# Altium PCB STM32_Breakout.PcbDoc (part 2 of 2)
Units mm, origin at the board's own origin, x right, y up, seen from the top; angles counter-clockwise.
Board outline 95 x 95 mm, 4 copper layers (F.Cu, In1.Cu, In2.Cu, B.Cu); 115 components, 175 nets, 535 pads, 365 vias.
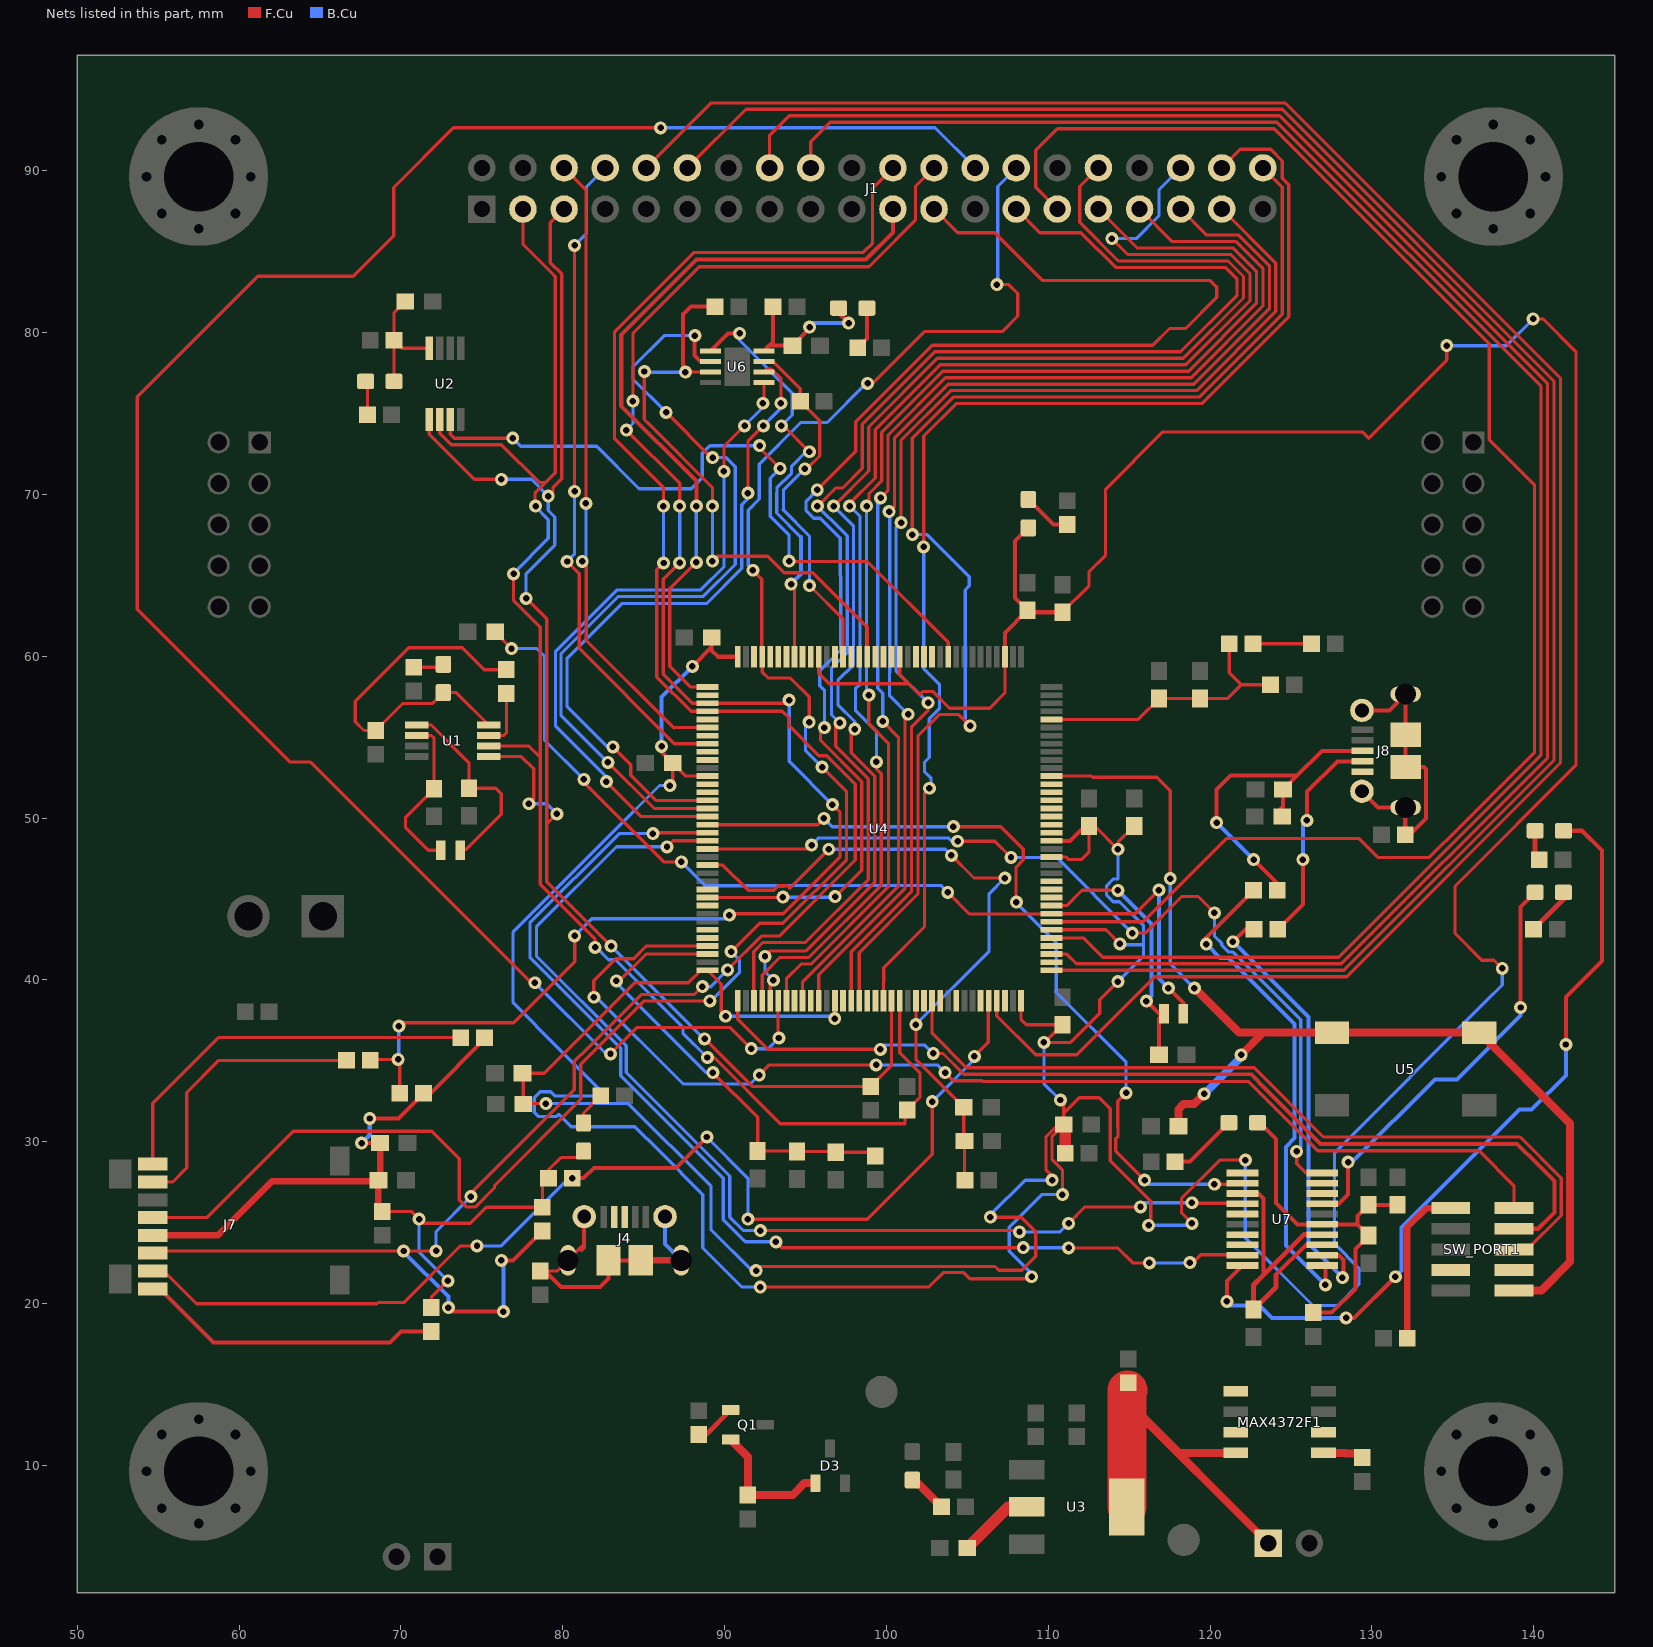
[diagram p2: the nets of this part, all layers, seen from the top]

## Via types
v1: diameter 0.8, hole 0.4, F.Cu to B.Cu, tented both sides, 363 vias
v2: diameter 1.2, hole 0.6, F.Cu to B.Cu, tented both sides, 2 vias

## Nets (pads, with @x,y where several pads share a name; then routed paths per layer and width w, separated by ;. In a path a pad name is that pad's centre, name@x,y a point inside that pad or via, vN(x,y) a via of type N, cw(c..) or ccw(c..) an arc to the next point about the centre after c; other vN are vias at no path point) (continued)
GPIO7: J1.21 U4.73 | length 46.9
  F.Cu w0.2: v1(88.25,65.8) 86.61,64.16 86.61,59.39 87.91,58.09 U4.73@88.943,58.09 ; v1@88.25,69.24 88.26,69.23 88.26,69.262 v1(88.25,69.272)
  F.Cu w0.25: v1(88.25,69.272) 88.25,70.81 83.612,75.448 83.612,79.837 88.275,84.5 98.72,84.5 100.4,86.18 J1.21@100.4,87.63
  B.Cu w0.2: v1(88.25,65.8) 88.23,65.82 88.23,65.96 88.25,65.98 v1(88.25,69.272)
GPIO8: J1.23 U4.99 | length 87.7
  F.Cu w0.2: U4.99@88.943,45.09 93.58,45.09 v1(93.6,45.11) ; v1(95.725,70.271) 98.104,72.65 98.104,74.494 102.816,79.206 116.447,79.206 117.49,80.25 118.484,80.25 120.41,82.176 120.41,82.79 119.979,83.221 109.629,83.221 106.68,86.17 104.4,86.17 J1.23@102.94,87.63 ; v1(96.163,55.582) 95.924,55.342 95.924,54.801 98.473,52.251 98.473,46.778 v1(96.833,45.137)
  B.Cu w0.2: v1(93.6,45.11) 96.806,45.11 v1(96.833,45.137) ; v1(95.725,70.271) 95.031,69.578 95.031,68.982 95.495,68.519 95.919,68.519 97.14,67.298 97.14,64.98 97.171,64.949 97.171,60.381 95.884,59.094 95.884,58.176 96.163,57.897 v1(96.163,55.582)
GPIO9: J1.27 U4.111 | length 86.9
  F.Cu w0.2: U4.111@91.795,38.68 91.795,41.744 92.359,42.308 94.992,42.308 98.873,46.188 98.873,52.417 96.863,54.427 96.863,55.872 96.869,55.877 v1(97.118,55.877) ; v1(95.731,69.272) 95.741,69.272 96.863,70.393 97.287,70.393 98.503,71.609 98.503,72.41 98.503,74.328 102.982,78.807 118.171,78.807 121.663,82.299 121.663,83.297 120.94,84.02 114.167,84.02 112.016,86.17 109.48,86.17 J1.27@108.02,87.63
  B.Cu w0.2: v1(95.731,69.272) 97.233,67.77 97.571,67.432 97.571,60.216 96.601,59.246 96.601,56.395 v1(97.118,55.877)
GPIO10: J1.29 U4.7 | length 99.7
  F.Cu w0.2: U4.7@110.193,43.59 115.865,43.59 121.014,48.74 129.173,48.74 130.351,47.562 133.547,47.562 135.48,49.496 140.051,54.066 140.051,70.565 137.255,73.361 ; J1.29@110.56,87.63 109.22,88.97 109.22,91.25 110.561,92.591 123.964,92.591 137.255,79.3 137.255,73.47
GPIO11: J1.31 U4.115 | length 78.8
  F.Cu w0.2: U4.115@93.818,38.715 93.818,40.068 94.73,40.98 95.36,40.98 100.122,45.742 100.122,54.628 98.908,55.842 v1(98.908,57.59) ; v1(98.769,69.272) 98.92,69.422 98.92,70.05 99.702,70.832 99.702,73.501 99.702,73.832 103.478,77.608 118.668,77.608 122.862,81.802 122.862,83.793 121.437,85.218 115.512,85.218 J1.31@113.1,87.63
  B.Cu w0.2: v1(98.769,69.272) 98.769,57.728 v1(98.908,57.59)
GPIO12: J1.33 U4.117 | length 76.1
  F.Cu w0.2: U4.117@94.818,38.715 94.818,39.873 100.741,45.796 100.741,54.998 v1(99.77,55.969) ; v1(99.642,69.78) 100.101,70.239 100.101,70.95 100.101,73.666 103.644,77.209 118.833,77.209 123.261,81.637 123.261,83.959 121.602,85.618 119.958,85.618 117.652,85.618 J1.33@115.64,87.63
  B.Cu w0.2: v1(99.642,69.78) 99.469,69.607 99.469,58.007 99.77,57.706 v1(99.77,55.969)
GPIO13: J1.35 U4.119 | length 73.8
  F.Cu w0.2: U4.119@95.818,38.715 95.818,40.308 101.14,45.63 101.14,56.38 101.172,56.412 v1(101.333,56.412) ; v1(100.168,68.93) 100.501,69.263 100.501,72.08 100.501,73.501 103.809,76.809 118.999,76.809 123.661,81.471 123.661,84.124 121.767,86.017 119.793,86.017 J1.35@118.18,87.63
  B.Cu w0.2: v1(100.168,68.93) 100.201,68.898 100.201,58.991 100.19,58.98 100.19,57.555 v1(101.333,56.412)
GPIO14: J1.37 U4.123 | length 71.7
  F.Cu w0.2: U4.123@97.818,38.715 97.818,41.743 101.551,45.476 101.551,55.641 102.571,56.661 v1(102.571,57.123) ; v1(100.9,68.25) 100.9,73.336 103.975,76.41 119.164,76.41 124.06,81.306 124.06,84.29 J1.37@120.72,87.63
  B.Cu w0.2: v1(100.9,68.25) 100.584,67.934 100.584,59.11 v1(102.571,57.123)
GPIO15: J1.6 U4.78 | length 39.7
  F.Cu w0.2: J1.6@80.08,90.17 81.43,88.82 v1(81.43,69.44) ; v1(81.203,65.858) 81.45,65.612 81.45,60.97 86.85,55.57 86.87,55.59 U4.78@88.943,55.59
  B.Cu w0.2: v1(81.203,65.858) 81.43,66.085 v1(81.43,69.44)
GPIO16: J1.8 U4.80 | length 41.3
  F.Cu w0.2: v1(80.264,65.85) 81.01,65.104 81.01,60.48 86.9,54.59 U4.80@88.943,54.59 ; v1(80.73,70.18) v1(80.73,85.39)
  B.Cu w0.2: v1(80.264,65.85) 80.73,66.316 v1(80.73,70.18) ; v1(80.73,85.39) 81.47,86.13 81.47,89.02 J1.8@82.62,90.17
GPIO17: J1.10 U4.141 | length 133.2
  F.Cu w0.2: J1.10@85.16,90.17 89.18,94.19 124.625,94.19 141.649,77.166 141.649,53.404 128.435,40.19 116.58,40.19 111.76,35.37 109.213,35.37 106.818,37.765 U4.141@106.818,38.715
GPIO18: J1.12 U4.1 | length 121.9
  F.Cu w0.2: J1.12@87.7,90.17 91.32,93.79 124.46,93.79 141.25,77 141.25,53.57 128.27,40.59 U4.1@110.193,40.59
GPIO19: J1.16 U4.3 | length 116.7
  F.Cu w0.2: J1.16@92.78,90.17 92.78,92.19 93.98,93.39 124.295,93.39 140.85,76.835 140.85,53.735 128.105,40.99 111.743,40.99 111.143,41.59 U4.3@110.193,41.59
GPIO20: J1.18 U4.5 | length 112.7
  F.Cu w0.2: J1.18@95.32,90.17 95.32,91.791 96.52,92.991 124.129,92.991 140.451,76.669 140.451,53.901 127.939,41.389 113.361,41.389 112.16,42.59 U4.5@110.193,42.59
GPIO21: R20.1 U4.59 U6.7 | length 22.8
  F.Cu w0.2: U6.7@92.425,78.205 93.001,78.205 94.68,76.526 R20.1@94.68,75.74 95.877,74.543 95.877,72.367 95.082,71.572 v1(94.958,71.572) v1@95.167,71.572 ; v1(95.245,64.365) 97.318,62.293 U4.59@97.318,59.965
  B.Cu w0.2: 93.616,69.047 95.245,67.417 v1(95.245,64.365) ; 93.632,69.03 93.632,70.247 v1(94.958,71.572)
GPIO22: R22.1 U4.56 U6.3 | length 36.7
  F.Cu w0.2: v1(85.036,77.59) 85.036,74.624 85.34,74.32 89.25,70.411 v1(89.25,69.272) ; v1(87.58,77.55) 87.585,77.555 U6.3@89.125,77.555 ; v1(89.247,65.875) 89.547,66.175 92.666,66.175 93.69,65.15 95.45,65.15 98.818,61.782 U4.56@98.818,59.965
  F.Cu w0.25: v1(87.58,77.55) 87.44,77.69 87.44,81.14 87.46,81.14 87.92,81.6 R22.1@89.4,81.6
  B.Cu w0.2: v1(85.036,77.59) 85.076,77.55 v1(87.58,77.55) ; v1(89.247,65.875) 89.25,65.878 v1(89.25,69.272)
GPIOEXTI1: U2.3 U4.46 | length 44.6
  F.Cu w0.2: U2.3@73.05,74.625 73.05,73.7 73.28,73.47 v1(76.907,73.47) ; v1(92.164,73.006) 92.164,72.864 v1(93.43,71.598) ; v1@93.98,65.85 96.28,65.85 98.818,65.85 103.818,60.85 U4.46@103.818,59.965
  B.Cu w0.2: v1(76.907,73.47) 77.404,72.973 82.089,72.973 84.709,70.352 87.941,70.352 88.621,71.032 88.621,72.538 89.088,73.006 v1(92.164,73.006) ; v1(93.43,71.598) 92.817,70.985 92.817,68.643 93.77,67.69 93.983,67.477 v1(93.983,65.875)
I2C1_SCL: J1.3 R26.1 U1.6 U2.2 U4.129 | length 94.8
  F.Cu w0.2: U2.2@72.4,74.625 72.4,73.785 73.115,73.07 76.2,73.07 78.535,70.735 78.935,70.735 ; U1.6@75.425,54.448 77.913,54.448 78.602,53.758 ; v1(76.962,65.088) 76.962,63.437 78.602,61.797 78.602,53.758 ; J1.3@77.54,87.63 77.54,85.446 79.248,83.738 79.532,83.455 79.532,74.58 79.532,71.332 78.935,70.735 ; v1(78.319,69.272) 78.28,69.31 78.28,70.08 78.935,70.735 ; v1(81.993,42.01) 81.993,42.512 79.772,44.732 78.602,45.903 78.602,52.41 78.602,53.758 ; v1(88.928,35.202) 89.348,35.202 93.44,31.11 101.14,31.11 101.14,31.82 R26.1@101.27,31.95 102.08,32.76 102.08,34.24 100.818,35.501 U4.129@100.818,38.715
  B.Cu w0.2: v1(76.962,65.088) 76.962,65.136 79.101,67.275 79.101,68.435 78.319,69.217 v1(78.319,69.272) ; v1(81.993,42.01) 82.06,42.01 82.823,41.247 83.257,41.247 87.422,37.082 87.422,36.708 v1(88.928,35.202)
I2C1_SDA: J1.5 R25.1 U1.5 U2.1 U4.128 | length 93.2
  F.Cu w0.2: U2.1@71.75,74.625 71.75,73.7 74.52,70.93 v1(76.2,70.93) ; U1.5@75.425,53.798 77.445,53.797 78.203,53.04 78.203,51.18 v1(77.903,50.88) ; v1(77.732,63.572) 79.002,62.301 79.002,61.885 79.002,49.632 ; v1(79.1,69.894) 79.4,70.194 79.4,70.24 79.4,70.439 79.931,70.97 79.931,83.62 79.23,84.321 79.23,86.78 J1.5@80.08,87.63 ; v1(79.638,50.258) 79.012,49.632 79.002,49.632 ; v1(82.99,42.08) 79.002,46.068 79.002,49.632 ; v1(88.77,36.35) 91.705,33.415 R25.1@99.02,33.415 100.318,34.713 U4.128@100.318,38.715
  B.Cu w0.2: v1(76.2,70.93) 78.065,70.93 v1(79.1,69.894) 79.1,69 79.5,68.6 79.5,66.864 77.732,65.096 v1(77.732,63.572) ; v1(77.903,50.88) 79.016,50.88 v1(79.638,50.258) ; v1(82.99,42.08) 88.72,36.35 v1(88.77,36.35)
LPUART1_CTS: U4.90 U7.2 | length 51.1
  F.Cu w0.2: U4.90@88.943,49.59 95.754,49.59 v1(96.139,49.975) ; v1(104.14,49.467) 107.061,49.467 108.458,48.07 108.458,47.417 108.01,46.969 108.01,44.816 v1(108.023,44.804) ; v1(114.808,33.022) 114.295,32.509 114.295,30.914 114.3,30.91 114.3,30.305 114.168,30.174 114.168,29.406 v1(115.951,27.623) ; v1(120.269,27.369) 121.926,27.369 U7.2@121.99,27.433
  B.Cu w0.2: v1(96.139,49.975) 96.647,49.467 104.013,49.467 v1(104.14,49.467) ; v1(108.023,44.804) 108.023,44.76 110.49,42.293 110.49,39.22 114.808,34.902 v1(114.808,33.022) ; v1(115.951,27.623) 116.205,27.369 v1(120.269,27.369)
LPUART1_RTS: U4.91 U7.9 | length 70
  F.Cu w0.2: v1(85.57,49.04) 85.62,49.09 U4.91@88.943,49.09 ; v1(93.17,23.81) 93.532,23.448 v1(108.452,23.448) ; v1(111.252,23.432) 114.3,23.432 115.222,22.51 v1(116.244,22.51) ; v1(118.745,22.53) 118.94,22.53 119.42,23.01 121.968,23.01 U7.9@121.99,22.988
  B.Cu w0.2: v1(85.57,49.04) 83.49,49.04 77.971,43.521 77.971,41.394 83.587,35.778 83.587,34.079 89.92,27.746 89.92,25.175 91.286,23.81 v1(93.17,23.81) ; v1(108.452,23.448) 111.236,23.448 v1(111.252,23.432) ; v1(116.244,22.51) 118.725,22.51 v1(118.745,22.53)
LPUART1_RX: U4.93 U7.20 | length 54.2
  F.Cu w0.2: U4.93@88.943,48.09 95.143,48.09 v1(95.377,48.324) ; v1(104.398,48.564) 106.694,48.564 v1(107.696,47.562) ; v1(115.189,42.89) 115.978,42.89 118.237,45.149 119.253,45.149 v1(120.269,44.133) ; v1(125.346,29.401) 125.346,28.642 125.92,28.068
  B.Cu w0.2: v1(95.377,48.324) 95.823,48.77 103.821,48.77 104.027,48.564 v1(104.398,48.564) ; v1(107.696,47.562) 110.517,47.562 v1(115.189,42.89) ; v1(120.269,44.133) 120.269,42.695 120.712,42.251 120.712,42.15 121.147,41.715 121.417,41.715 125.603,37.529 125.603,29.658 v1(125.346,29.401)
LPUART1_TX: U4.92 U7.4 | length 68.5
  F.Cu w0.2: v1(86.44,48.22) 86.81,48.59 U4.92@88.943,48.59 ; v1(92.21,24.51) 108.129,24.51 v1(108.22,24.42) ; v1(111.252,24.956) 112.268,25.972 v1(115.697,25.972) ; v1(118.872,26.226) 118.898,26.2 121.952,26.2 U7.4@121.99,26.163
  B.Cu w0.2: v1(86.44,48.22) 83.321,48.22 78.37,43.27 78.37,41.475 83.927,35.918 83.927,34.274 90.32,27.881 90.32,25.341 91.15,24.51 v1(92.21,24.51) ; v1(108.22,24.42) 110.716,24.42 v1(111.252,24.956) ; v1(115.697,25.972) 115.951,26.226 v1(118.872,26.226)
Net-(C1-Pad1): C1.1 D1.2 FB1.2 U2.5 | length 7.6
  F.Cu w0.2: D1.2@69.57,76.98 FB1.2@69.57,79.52 ; C1.1@70.265,81.91 69.57,81.215 FB1.2@69.57,79.52 ; U2.5@71.75,79.025 70.065,79.025 FB1.2@69.57,79.52
Net-(C3-Pad1): C3.1 O1.1 U1.2 | length 10.1
  F.Cu w0.2: U1.2@70.975,55.098 71.874,55.097 72.05,54.922 C3.1@72.05,51.813 70.288,50.051 70.288,49.41 71.696,48.002 O1.1@72.46,48.002
Net-(C4-Pad1): C4.1 O1.2 U1.1 | length 12.6
  F.Cu w0.2: U1.1@70.975,55.748 71.874,55.748 74.2,53.422 C4.1@74.2,51.843 75.854,51.842 76.2,51.496 76.2,50.226 74.044,48.07 O1.2@73.66,48.07
Net-(C5-Pad1): C5.1 U3.2 | length 4.7
  F.Cu w0.7: C5.1@104.99,4.89 107.53,7.43 U3.2@108.66,7.43
Net-(C21-Pad2): C21.2 C23.2 R10.2 R11.2 U4.32 | length 17.3
  F.Cu w0.2: U4.32@110.193,56.09 115.55,56.09 C21.2@116.84,57.38 C23.2@119.38,57.38 121.07,57.38 121.92,58.23 ; R10.2@121.185,60.77 121.185,58.965 121.92,58.23 ; R11.2@123.725,58.23 121.92,58.23
Net-(C24-Pad1): C24.1 O2.2 U4.8 | length 59.6
  F.Cu w0.2: C24.1@75.83,61.513 75.83,61.47 v1(76.832,60.468) ; v1(81.299,52.385) 81.299,52.221 86.231,47.29 v1(87.33,47.29) ; v1(103.789,45.403) 105.124,44.067 109.51,44.067 ; U4.8@110.193,44.09 115.376,44.09 v1(116.828,45.542)
  F.Cu w0.25: v1(117.415,39.491) 118.345,38.561 O2.2@118.345,37.91
  B.Cu w0.2: v1(76.832,60.468) 78.407,60.468 78.864,60.011 78.864,54.82 v1(81.299,52.385) ; v1(87.33,47.29) 88.81,45.81 93.67,45.81 93.697,45.837 103.355,45.837 v1(103.789,45.403)
  B.Cu w0.25: v1(116.828,45.542) 116.828,40.078 v1(117.415,39.491)
Net-(C25-Pad1): C25.1 O2.1 U4.9 | length 16.4
  F.Cu w0.2: U4.9@110.193,44.59 111.143,44.59 112.083,45.53 v1(114.3,45.53)
  F.Cu w0.25: v1(116.065,38.685) 116.84,37.91 O2.1@117.145,37.91 116.84,37.605 C25.1@116.84,35.37
  B.Cu w0.25: v1(114.3,45.53) 116.378,43.452 116.378,38.999 v1(116.065,38.685)
Net-(C26-Pad2): C26.2 D6.2 FB9.2 U6.8 | length 10.2
  F.Cu w0.25: FB9.2@92.995,81.6 92.995,79.425 U6.8@92.425,78.855 92.755,79.185 C26.2@94.185,79.185 95.25,80.25 v1(95.25,80.328) ; D6.2@97.04,81.51 97.04,81.205 v1(97.663,80.582)
  B.Cu w0.25: v1(95.25,80.328) 95.504,80.582 v1(97.663,80.582)
Net-(C27-Pad1): C27.1 C28.1 D7.2 FB10.1 J7.4 R14.1 R15.2 R17.1 R19.2 R21.1 | length 54.2
  F.Cu w0.2: FB10.1@68.834,25.691 70.639,25.691 v1(71.12,25.21) 71.374,24.956 74.295,24.956 75.284,25.945 R17.1@78.74,25.945 78.74,27.375 R14.1@79.115,27.75 79.115,28.252 79.883,29.02 80.885,29.02 D7.2@81.28,29.415 ; R21.1@71.882,19.749 71.882,20.384 v1(72.898,21.4)
  F.Cu w0.25: v1(67.564,29.909) C28.1@68.707,29.909 ; v1(68.072,31.433) 69.838,31.433 R15.2@71.395,32.99 71.814,32.99 75.165,36.341 R19.2@75.165,36.43
  F.Cu w0.4: J7.4@54.664,24.208 58.688,24.208 62.048,27.568 68.558,27.568 C27.1@68.61,27.62 ; C28.1@68.707,29.909 68.707,27.717 C27.1@68.61,27.62 ; FB10.1@68.834,25.691 68.61,25.915 C27.1@68.61,27.62
  B.Cu w0.2: v1(71.12,25.21) 71.12,23.178 v1(72.898,21.4)
  B.Cu w0.25: v1(67.564,29.909) 68.072,30.417 v1(68.072,31.433)
Net-(C29-Pad2): C29.2 C30.2 C31.2 D8.2 FB11.2 U7.15 | length 22.2
  F.Cu w0.25: D8.2@122.922,31.179 123.063,31.179 124.079,30.163 124.079,26.214 125.4,24.893 U7.15@126.93,24.893 129.095,24.893 ; FB11.2@126.365,19.441 127.508,19.441 128.969,20.902 128.969,23.369 C29.2@129.794,24.194 129.095,24.893 ; C30.2@131.572,26.099 C31.2@129.794,26.099 129.095,25.401 129.095,24.893
Net-(C32-Pad2): C32.2 U7.3 U7.13 U7.14 | length 19.7
  F.Cu w0.25: U7.3@121.99,26.798 122.999,26.798 123.3,26.497 123.3,21.764 123.19,21.654 ; 124.079,21.781 125.921,23.623 U7.13@126.93,23.623
  F.Cu w0.3: 124.079,21.781 124.079,21.019 C32.2@122.682,19.622 122.682,21.146 123.19,21.654 125.793,24.258 U7.14@126.93,24.258
Net-(C33-Pad2): C33.2 C34.1 J8.3 R28.2 | length 20.5
  F.Cu w0.25: v1(120.396,49.721) 120.396,51.762 121.252,52.617 125.374,52.617 ; v1(122.682,47.435) 124.152,45.965 R28.2@124.152,45.53 ; C34.1@124.185,50.377 124.509,50.702 C33.2@124.509,51.753 125.374,52.617 ; J8.3@129.405,54.15 126.906,54.15 125.374,52.617
  B.Cu w0.25: v1(120.396,49.721) v1(122.682,47.435)
Net-(D1-Pad1): D1.1 R2.1 | length 2.1
  F.Cu w0.2: D1.1@67.82,76.98 67.94,76.86 R2.1@67.94,74.92
Net-(D2-Pad1): D2.1 R3.1 | length 1.9
  F.Cu w0.2: R3.1@70.79,59.313 72.435,59.313 D2.1@72.62,59.498
Net-(D2-Pad2): D2.2 FB3.2 R1.1 U1.8 | length 22.8
  F.Cu w0.2: U1.8@75.425,55.748 73.425,57.747 D2.2@72.62,57.748 71.955,57.083 70.127,57.083 FB3.2@68.453,55.409 67.718,55.409 67.183,55.944 67.183,57.215 70.484,60.516 73.787,60.516 75.136,59.167 R1.1@76.52,59.167
Net-(D4-Pad1): D4.1 R5.1 | length 2.5
  F.Cu w0.5: D4.1@101.6,9.095 101.74,9.095 R5.1@103.405,7.43
Net-(D5-Pad1): D5.1 R9.1 | length 3
  F.Cu w0.25: D5.1@108.77,69.684 110.318,68.136 R9.1@111.17,68.136
Net-(D6-Pad1): D6.1 R12.1 | length 2.7
  F.Cu w0.25: R12.1@98.225,79.058 98.79,79.623 D6.1@98.79,81.51
Net-(D7-Pad1): D7.1 R13.1 | length 2.1
  F.Cu w0.2: D7.1@81.28,31.165 81.28,31.76 R13.1@82.35,32.83
Net-(D8-Pad1): D8.1 R27.1 | length 4.3
  F.Cu w0.25: R27.1@117.829,28.766 118.759,28.766 D8.1@121.172,31.179
Net-(D9-Pad1): D9.1 U7.17 | length 26.2
  F.Cu w0.25: U7.17@126.93,26.163 127.939,26.163 128.524,26.747 v1(128.524,28.741) ; v1(139.192,38.291) 139.192,44.514 D9.1@140.081,45.403
  B.Cu w0.25: v1(128.524,28.741) 128.778,28.741 133.883,33.846 135.255,33.846 139.192,37.783 v1(139.192,38.291)
Net-(D9-Pad2): D9.2 R30.1 | length 3.1
  F.Cu w0.3: R30.1@139.981,43.117 141.831,44.967 D9.2@141.831,45.403
Net-(D10-Pad1): D10.1 U7.10 | length 49.5
  F.Cu w0.25: v1(121.031,20.13) 121.031,21.394 U7.10@121.99,22.353 ; v1(128.397,19.114) 128.9,19.114 v1(131.44,21.654) ; D10.1@141.831,49.213 142.988,49.213 144.214,47.987 144.214,41.154 141.986,38.926 v1(141.986,36.005)
  B.Cu w0.25: v1(121.031,20.13) 121.285,19.876 123.063,19.876 123.825,19.114 v1(128.397,19.114) ; v1(131.44,21.654) 131.821,22.035 131.821,24.697 139.105,31.981 139.867,31.981 141.986,34.1 v1(141.986,36.005)
Net-(D10-Pad2): D10.2 R31.1 | length 1.9
  F.Cu w0.3: D10.2@140.081,49.213 140.081,47.689 R31.1@140.335,47.435
Net-(FB2-Pad1): FB2.1 Q1.1 | length 2.6
  F.Cu w0.3: FB2.1@88.392,11.902 88.847,11.902 Q1.1@90.37,13.425
Net-(FB4-Pad1): FB4.1 MAX4372F1.1 | length 2.5
  F.Cu w0.5: MAX4372F1.1@127.002,10.765 128.364,10.765 128.397,10.732 129.159,10.732 FB4.1@129.413,10.478
Net-(FB8-Pad2): FB8.2 R10.1 | length 3.6
  F.Cu w0.2: R10.1@122.655,60.77 FB8.2@126.265,60.77
Net-(J4-PadS1): J4.S1 J4.S2 J4.S3 J4.S4 J4.S5 J4.S6 R16.1 | length 19.2
  F.Cu w0.2: R16.1@78.613,22.008 79.658,22.008 J4.S1@80.32,22.67 81.122,23.472 81.32,23.472
  F.Cu w0.25: R16.1@78.613,22.008 78.894,22.008 79.883,21.019 82.296,21.019 82.82,21.543 J4.S5@82.82,22.67 J4.S6@84.82,22.67 ; 81.153,23.503 81.153,23.305 81.32,23.472 J4.S3@81.32,25.37
  F.Cu w0.4: J4.S6@84.82,22.67 J4.S2@87.32,22.67
  B.Cu w0.25: J4.S4@86.32,25.37 86.32,23.67 J4.S2@87.32,22.67
Net-(J7-Pad1): J7.1 R21.2 | length 19
  F.Cu w0.25: J7.1@54.965,21.045 58.42,17.59 69.315,17.59 70.004,18.279 R21.2@72.263,18.279
Net-(J7-Pad7): J7.7 R18.1 | length 17.8
  F.Cu w0.2: J7.7@54.664,27.508 55.892,27.508 56.769,28.385 56.769,33.039 58.75,35.02 R18.1@66.635,35.02
Net-(J7-Pad8): J7.8 R19.1 | length 24.5
  F.Cu w0.2: J7.8@54.664,28.608 54.664,32.374 58.72,36.43 R19.1@73.695,36.43
Net-(J8-Pad2): J8.2 R29.2 | length 13.5
  F.Cu w0.25: R29.2@124.179,43.117 125.73,44.668 v1(125.73,47.435) ; v1(125.984,49.848) 125.984,51.626 127.858,53.5 J8.2@129.405,53.5
  B.Cu w0.25: v1(125.73,47.435) 125.73,49.594 v1(125.984,49.848)
Net-(J8-PadS1): J8.S1 J8.S2 J8.S3 J8.S4 J8.S5 J8.S6 R32.1 | length 18.5
  F.Cu w0.25: J8.S3@129.38,51.65 130.38,50.65 J8.S1@132.08,50.65 ; J8.S4@129.38,56.65 131.08,56.65 J8.S2@132.08,57.65 J8.S6@132.08,55.15 J8.S5@132.08,53.15 133.223,53.15 133.35,53.023 133.35,49.975 132.334,48.959 R32.1@132.053,48.959
  F.Cu w0.3: R32.1@132.053,48.959 132.053,50.623 J8.S1@132.08,50.65
Net-(Q1-Pad2): D3.1 Q1.2 R4.2 | length 8.3
  F.Cu w0.5: Q1.2@90.37,11.595 91.44,10.525 R4.2@91.44,8.165 94.207,8.165 94.942,8.9 D3.1@95.605,8.9
Net-(R1-Pad2): R1.2 U1.7 | length 3.6
  F.Cu w0.2: U1.7@75.425,55.098 76.35,55.097 76.52,55.267 R1.2@76.52,57.697
Net-(R23-Pad1): R23.1 SW_PORT1.1 | length 10
  F.Cu w0.4: R23.1@132.18,17.844 132.18,24.705 133.365,25.89 SW_PORT1.1@134.87,25.89
Net-(R28-Pad1): R28.1 U7.11 | length 30.7
  F.Cu w0.25: v1(119.761,42.214) 119.761,42.609 R28.1@122.682,45.53 ; U7.11@126.93,22.353 127.127,22.156 v1(127.127,21.146)
  B.Cu w0.25: v1(119.761,42.214) 120.624,41.351 121.146,41.351 125.222,37.275 125.222,30.217 124.681,29.676 124.681,23.592 v1(127.127,21.146)
Net-(R29-Pad1): R29.1 U7.12 | length 27.7
  F.Cu w0.25: v1(121.412,42.355) 122.174,43.117 R29.1@122.709,43.117 ; U7.12@126.93,22.988 127.939,22.988 128.24,22.687 128.24,21.68 v1(128.166,21.606)
  B.Cu w0.25: v1(121.412,42.355) 126.07,37.697 126.07,23.702 v1(128.166,21.606)
NRST: C20.2 SW_PORT1.10 U4.25 U5.1 U5.4 | length 68.3
  F.Cu w0.2: U4.25@110.193,52.59 112.667,52.59 112.742,52.515 116.713,52.515 117.535,51.693 v1(117.535,46.249)
  F.Cu w0.5: C20.2@118.046,30.95 118.046,32.004 118.364,32.322 118.999,32.322 v1(119.634,32.957) ; v1(119.03,39.491) 121.786,36.735 123.285,36.735 ; v1(121.92,35.37) 123.285,36.735 ; SW_PORT1.10@138.77,20.81 140.47,20.81 142.24,22.58 142.24,31.122 U5.4@136.627,36.735 U5.1@127.533,36.735 123.285,36.735
  B.Cu w0.2: v1(117.535,46.249) 117.53,46.244 117.53,40.991 v1(119.03,39.491)
  B.Cu w0.5: v1(119.634,32.957) 121.92,35.243 v1(121.92,35.37)
PM_Input: J2.1 MAX4372F1.8 R8.1 U3.4 | length 33.2
  F.Cu w0.5: R8.1@114.86,14.815 114.86,13.994 ; MAX4372F1.8@121.578,10.765 118.089,10.765 114.86,13.994 ; J2.1@123.595,5.19 114.86,13.925 114.86,13.994
  F.Cu w2.42: U3.4@114.86,7.43 114.86,9.41 ; 114.86,13.994 114.86,9.41 ; R8.1@114.935,14.644 114.86,14.644 114.86,9.41
SPI1_MISO: U4.88 U6.2 | length 50.7
  F.Cu w0.2: v1(82.79,53.437) 85.638,50.59 U4.88@88.943,50.59 ; v1(86.38,75.06) 89.167,72.273 v1(89.26,72.273)
  F.Cu w0.25: v1(88.164,79.81) 88.15,79.796 88.15,78.568 88.514,78.205 U6.2@89.125,78.205
  B.Cu w0.2: v1(82.79,53.437) 79.883,56.345 79.883,60.135 83.441,63.693 88.687,63.693 90.66,65.666 90.66,71.71 90.096,72.273 v1(89.26,72.273) ; v1(86.38,75.06) 84.337,77.103 84.337,77.88 86.267,79.81 v1(88.164,79.81)
SPI1_MOSI: U4.89 U6.5 | length 41.5
  F.Cu w0.2: v1(82.699,52.25) 84.859,50.09 U4.89@88.943,50.09 ; v1(89.96,71.42) 89.96,72.96 v1(91.23,74.23) ; v1(92.364,75.63) 92.425,75.69 U6.5@92.425,76.905
  B.Cu w0.2: v1(82.699,52.25) 82.699,52.54 79.543,55.695 79.543,60.276 83.361,64.093 88.521,64.093 89.96,65.531 v1(89.96,71.42) ; v1(91.23,74.23) 92.364,75.365 v1(92.364,75.63)
SPI1_NSS: U4.65 U6.1 | length 26.6
  F.Cu w0.2: v1(93.51,74.23) 93.64,74.23 v1(95.238,72.632) ; v1(94.11,64.451) 94.318,64.243 U4.65@94.318,59.965
  F.Cu w0.25: U6.1@89.125,78.855 90.217,79.947 v1(90.932,79.947)
  B.Cu w0.2: v1(90.932,79.947) 90.932,79.508 94.18,76.26 94.18,74.901 v1(93.51,74.23) ; 94.708,67.355 93.216,68.846 93.216,70.065 93.233,70.082 93.233,70.413 94.135,71.315 94.135,71.739 95.028,72.632 v1(95.238,72.632)
  B.Cu w0.25: v1(94.11,64.451) 94.11,64.49 94.708,65.088 94.708,67.355
SPI1_SCK: U4.87 U6.6 | length 41.7
  F.Cu w0.2: v1(83.091,54.39) 84.201,53.281 84.201,52.642 85.753,51.09 U4.87@88.943,51.09 ; v1(91.44,70.075) 91.44,73.271 v1(92.4,74.23) ; U6.6@92.425,77.555 92.615,77.745 92.896,77.745 93.48,77.161 v1(93.48,75.63)
  B.Cu w0.2: v1(83.091,54.39) 82.758,54.39 80.264,56.884 80.264,59.881 83.633,63.25 88.88,63.25 91.059,65.429 91.059,69.36 91.44,69.741 v1(91.44,70.075) ; v1(92.4,74.23) 93.48,75.31 v1(93.48,75.63)
SPI2_MISO: J1.24 R15.1 R18.2 U4.75 | length 105.2
  F.Cu w0.2: R18.2@68.105,35.02 68.165,35.08 v1(69.83,35.08) 69.925,34.985 R15.1@69.925,32.99 ; v1(69.87,37.14) 70.08,37.35 73.55,37.35 76.96,37.35 80.736,41.126 v1(80.736,42.723) ; v1(83.93,73.97) 87.22,70.68 v1(87.22,69.272) ; v1(84.337,75.76) 84.337,79.961 85.498,81.122 88.436,84.06 95.43,84.06 98.92,84.06 99.31,84.45 101.79,86.93 101.79,89.02 J1.24@102.94,90.17 ; v1(87.225,65.765) 86.21,64.75 86.21,59.65 86.21,58.873 87.993,57.09 U4.75@88.943,57.09 93.791,57.09 v1(93.991,57.29) ; v1(90.297,44.006) 90.376,44.085 93.625,44.085 97.135,47.595 97.135,50.35 v1(96.653,50.832)
  B.Cu w0.2: v1(69.83,35.08) 69.87,35.12 v1(69.87,37.14) ; v1(80.736,42.723) 81.79,43.777 90.068,43.777 v1(90.297,44.006) ; v1(83.93,73.97) 84.337,74.377 v1(84.337,75.76) ; v1(87.22,69.272) 87.225,69.266 v1(87.225,65.765) ; v1(93.991,57.29) 93.991,53.495 v1(96.653,50.832)
SPI2_MOSI: J1.22 J7.3 R17.2 U4.76 | length 136.6
  F.Cu w0.2: J7.3@54.103,23.245 v1(70.171,23.245) 71.805,23.245 72.165,23.245 v1(72.17,23.25) ; v1(74.32,26.6) 74.32,26.809 80.71,33.2 80.71,34.975 81.098,35.362 81.133,35.362 84.868,39.098 88.138,39.098 v1(88.62,39.58) ; v1(86.22,69.272) 86.22,70.43 83.188,73.462 83.188,80.012 88.125,84.95 98.57,84.95 99.14,85.52 99.14,88.91 J1.22@100.4,90.17 ; v1(86.226,65.758) 85.811,65.343 85.811,59.34 85.811,58.707 87.928,56.59 U4.76@88.943,56.59 93.57,56.59 93.98,56.18 93.98,55.69 95.82,53.85 96.31,53.85 98.074,52.086 98.074,47.404 93.377,42.707 92.273,42.707 v1(90.179,40.613)
  F.Cu w0.25: v1(72.932,19.749) 73.186,19.495 v1(76.327,19.495) ; v1(76.2,22.67) 76.935,22.67 R17.2@78.74,24.475
  B.Cu w0.2: v1(72.17,23.25) 72.17,24.45 v1(74.32,26.6) ; v1(86.22,69.272) 86.22,65.763 v1(86.226,65.758) ; v1(88.62,39.58) 89.146,39.58 v1(90.179,40.613)
  B.Cu w0.25: v1(70.171,23.245) 70.171,23.187 72.932,20.427 v1(72.932,19.749) ; v1(76.2,22.67) 76.327,22.543 v1(76.327,19.495)
SPI2_NSS: J7.2 R14.2 U4.140 | length 68.3
  F.Cu w0.2: J7.2@55.203,22.145 57.368,19.98 68.51,19.98 68.59,20.06 70.181,20.06 73.68,23.559 v1(74.698,23.559) ; v1(91.44,25.21) 98.81,25.21 102.83,29.23 v1(102.83,32.48) ; v1(105.43,35.27) 106.295,36.135 106.295,38.03
  F.Cu w0.25: v1(80.585,27.75) 81.28,27.75 81.915,28.385 86.995,28.385 v1(88.9,30.29)
  B.Cu w0.2: v1(74.698,23.559) 76.185,23.559 80.376,27.75 v1(80.585,27.75) ; v1(88.9,30.29) 91.44,27.75 v1(91.44,25.21) ; v1(102.83,32.48) 105.43,35.08 v1(105.43,35.27)
SPI2_NSS2: J1.26 U4.114 | length 129.2
  F.Cu w0.2: v1(78.28,39.82) 78.054,39.82 64.417,53.457 63.153,53.457 53.711,62.899 53.711,76.021 61.16,83.47 67.04,83.47 69.55,85.98 69.55,88.96 73.24,92.65 v1(86.04,92.65) ; v1(82.948,35.428) 84.57,37.05 90.341,37.05 v1(91.645,35.745) ; U4.114@93.295,38.53 93.295,36.457 v1(93.346,36.406)
  B.Cu w0.2: v1(78.28,39.82) 82.672,35.428 v1(82.948,35.428) ; v1(86.04,92.65) 103,92.65 J1.26@105.48,90.17 ; v1(91.645,35.745) 92.686,35.745 v1(93.346,36.406)
SPI2_SCK: J1.28 J7.5 U4.69 | length 118.4
  F.Cu w0.2: J7.5@54.664,25.308 58.01,25.308 63.351,30.649 71.904,30.649 73.596,28.957 73.596,26.417 74.053,25.96 74.584,25.96 75.78,27.156 75.78,27.28 81.11,32.611 81.11,34.775 85.034,38.699 v1(89.091,38.699) ; v1(90.403,41.741) 92.159,43.498 93.602,43.498 97.535,47.43 97.535,51.636 v1(96.02,53.15) ; v1(91.748,65.31) 92.295,64.763 U4.69@92.295,60.38 ; U4.69@92.318,59.965 92.318,59.015 92.683,58.65 94.06,58.65 95.224,57.486 v1(95.224,55.924) ; v1(98.838,76.853) 99.141,76.853 102.343,80.055 107.145,80.055 108.11,81.02 108.11,82.41 107.559,82.96 v1(106.82,82.96)
  B.Cu w0.2: v1(89.091,38.699) 89.169,38.699 90.915,40.444 90.915,41.229 v1(90.403,41.741) ; v1(91.748,65.31) 91.459,65.6 91.459,69.03 92.14,69.711 92.14,71.871 94.709,74.44 96.33,74.44 98.743,76.853 v1(98.838,76.853) ; v1(95.224,55.924) 94.99,55.69 94.99,54.18 v1(96.02,53.15) ; v1(106.82,82.96) 106.87,83.01 106.87,89.02 J1.28@108.02,90.17
SPI3_MISO: J1.36 U4.112 | length 85.6
  F.Cu w0.2: U4.112@92.318,38.715 92.318,40.288 93.41,41.38 95.195,41.38 99.672,45.857 99.672,52.748 99.377,53.043 v1(99.377,53.467) ; v1(97.73,69.272) 97.73,69.438 99.302,71.01 99.302,73.997 103.313,78.008 118.502,78.008 122.462,81.968 122.462,83.628 121.271,84.819 114.922,84.819 v1(113.935,85.805)
  B.Cu w0.2: v1(97.73,69.272) 98.37,68.632 98.37,58.279 98.084,57.993 98.084,56.666 99.377,55.373 v1(99.377,53.467) ; v1(113.935,85.805) 115.441,85.805 116.84,87.204 116.84,88.83 J1.36@118.18,90.17
SPI3_MOSI: J1.32 U4.113 | length 85.9
  F.Cu w0.2: v1(92.495,41.455) 92.826,41.785 95.035,41.785 99.272,46.023 99.272,52.582 97.818,54.037 97.818,55.267 v1(98.039,55.489) ; U4.113@92.818,38.715 92.818,39.775 v1(93.018,39.975) ; v1(96.73,69.272) 98.903,71.444 98.903,72.78 98.903,74.163 103.147,78.407 118.337,78.407 122.063,82.133 122.063,83.462 121.106,84.419 114.332,84.419 111.95,86.801 111.95,89.02 J1.32@113.1,90.17
  B.Cu w0.2: v1(92.495,41.455) 92.495,40.497 v1(93.018,39.975) ; v1(96.73,69.272) 97.97,68.032 97.97,59.47 97.001,58.5 97.001,57.001 98.039,55.962 v1(98.039,55.489)
SPI3_NSS: J1.38 U4.127 | length 77
  F.Cu w0.2: U4.127@99.818,38.715 99.818,39.848 99.83,39.86 99.83,40.76 102.35,43.28 102.35,51.539 v1(102.65,51.839) ; v1(102.299,66.749) v1(102.299,66.749) 102.3,73.605 104.305,75.61 119.495,75.61 124.86,80.975 124.86,89.135 124.46,89.535 124.46,90.596 123.736,91.32 121.87,91.32 J1.38@120.72,90.17
  B.Cu w0.2: v1(102.299,66.749) 102.299,59.235 103.271,58.262 103.271,56.745 102.65,56.124 102.65,53.74 102.35,53.44 102.35,52.86 102.76,52.45 102.76,51.949 v1(102.65,51.839)
SPI3_SCK: J1.40 U4.124 | length 77.5
  F.Cu w0.2: U4.124@98.318,38.715 98.318,41.678 101.95,45.31 101.95,55.08 103.26,56.39 104.469,56.39 v1(105.169,55.69) ; v1(101.6,67.516) 101.6,73.47 104.14,76.01 119.33,76.01 124.46,81.14 124.46,88.97 J1.40@123.26,90.17
  B.Cu w0.2: v1(101.6,67.516) 102.52,67.516 105.118,64.918 105.118,64.339 104.869,64.089 104.869,55.99 v1(105.169,55.69)
SWCLK: SW_PORT1.4 U4.109 | length 66.9
  F.Cu w0.2: U4.109@90.818,38.715 90.818,37.562 92.674,35.706 v1(99.619,35.706) ; v1(102.89,35.45) 103.495,35.45 104.774,34.171 122.519,34.171 126.824,29.865
  F.Cu w0.25: 122.544,34.146 123.405,33.285 126.824,29.865 129.81,29.865 138.975,29.865 140.225,28.615 141.266,27.574 141.266,25.616 141.04,25.39 140.27,24.62 SW_PORT1.4@138.77,24.62
  B.Cu w0.2: v1(99.619,35.706) 99.882,35.97 102.37,35.97 v1(102.89,35.45)
SWDIO: SW_PORT1.2 U4.105 | length 73
  F.Cu w0.2: v1(81.915,38.926) 81.915,39.942 83.28,41.307 84.378,41.307 85.161,42.09 U4.105@88.943,42.09 ; v1(92.14,34.115) 92.767,34.742 v1(99.357,34.742) ; v1(103.625,34.264) 104.118,33.771 105.91,33.771 105.96,33.721 122.368,33.721 126.648,29.441 136.619,29.441 138.77,27.29 SW_PORT1.2@138.77,25.89
  B.Cu w0.2: v1(81.915,38.926) 82.072,38.926 87.432,33.566 91.591,33.566 v1(92.14,34.115) ; v1(99.357,34.742) 103.148,34.742 v1(103.625,34.264)
SWO: SW_PORT1.6 U4.133 | length 50.7
  F.Cu w0.2: U4.133@102.818,38.715 102.818,36.692 104.94,34.57 122.72,34.57 127,30.29 139.15,30.29 141.69,27.75 141.69,25.44 139.6,23.35 SW_PORT1.6@138.77,23.35
unconnected-(J4-Pad2): J4.2
unconnected-(J4-Pad3): J4.3
unconnected-(J8-Pad1): J8.1
unconnected-(MAX4372F1-Pad2): MAX4372F1.2
unconnected-(MAX4372F1-Pad5): MAX4372F1.5
unconnected-(MAX4372F1-Pad7): MAX4372F1.7
unconnected-(SW_PORT1-Pad7): SW_PORT1.7
unconnected-(SW_PORT1-Pad8): SW_PORT1.8
unconnected-(U4-Pad2): U4.2
unconnected-(U4-Pad4): U4.4
unconnected-(U4-Pad10): U4.10
unconnected-(U4-Pad11): U4.11
unconnected-(U4-Pad12): U4.12
unconnected-(U4-Pad18): U4.18
unconnected-(U4-Pad19): U4.19
unconnected-(U4-Pad20): U4.20
unconnected-(U4-Pad21): U4.21
unconnected-(U4-Pad22): U4.22
unconnected-(U4-Pad23): U4.23
unconnected-(U4-Pad24): U4.24
unconnected-(U4-Pad48): U4.48
unconnected-(U4-Pad49): U4.49
unconnected-(U4-Pad50): U4.50
unconnected-(U4-Pad53): U4.53
unconnected-(U4-Pad54): U4.54
unconnected-(U4-Pad55): U4.55
unconnected-(U4-Pad57): U4.57
unconnected-(U4-Pad58): U4.58
unconnected-(U4-Pad60): U4.60
unconnected-(U4-Pad63): U4.63
unconnected-(U4-Pad64): U4.64
unconnected-(U4-Pad66): U4.66
unconnected-(U4-Pad67): U4.67
unconnected-(U4-Pad68): U4.68
unconnected-(U4-Pad70): U4.70
unconnected-(U4-Pad74): U4.74
unconnected-(U4-Pad77): U4.77
unconnected-(U4-Pad79): U4.79
unconnected-(U4-Pad81): U4.81
unconnected-(U4-Pad82): U4.82
unconnected-(U4-Pad85): U4.85
unconnected-(U4-Pad86): U4.86
unconnected-(U4-Pad98): U4.98
unconnected-(U4-Pad100): U4.100
unconnected-(U4-Pad103): U4.103
unconnected-(U4-Pad104): U4.104
unconnected-(U4-Pad116): U4.116
unconnected-(U4-Pad118): U4.118
unconnected-(U4-Pad122): U4.122
unconnected-(U4-Pad125): U4.125
unconnected-(U4-Pad126): U4.126
unconnected-(U4-Pad132): U4.132
unconnected-(U4-Pad134): U4.134
unconnected-(U4-Pad136): U4.136
unconnected-(U4-Pad139): U4.139
unconnected-(U4-Pad142): U4.142
unconnected-(U7-Pad1): U7.1
unconnected-(U7-Pad5): U7.5
unconnected-(U7-Pad7): U7.7
unconnected-(U7-Pad8): U7.8
unconnected-(U7-Pad18): U7.18
unconnected-(U7-Pad19): U7.19
VDDIO2: C6.2 C8.2 FB6.2 U4.95 U4.131 | length 44.6
  F.Cu w0.2: U4.95@88.943,47.09 89.893,47.09 91.453,45.53 93.031,45.53 93.31,45.81 93.89,45.81 94.032,45.667 v1(96.435,48.07) ; U4.131@101.818,38.715 v1(101.818,37.239) 101.818,35.082 C6.2@104.77,32.13 104.77,30.09 C8.2@104.82,30.04 104.82,27.665 FB6.2@104.855,27.63 ; v1(104.013,47.689) 105.41,46.292 v1(107.315,46.292)
  B.Cu w0.2: v1(96.435,48.07) 102.997,48.07 103.632,48.07 v1(104.013,47.689) ; v1(101.818,37.239) 106.34,41.761 106.34,45.317 v1(107.315,46.292)
VDDMAIN: C10.2 C12.2 C13.2 C14.2 C15.2 C16.2 C17.2 C18.2 C19.2 C22.2 D5.2 FB5.1 U4.6 U4.15 U4.17 U4.39 U4.52 U4.62 U4.72 U4.84 U4.108 U4.121 U4.144 | length 402.1
  F.Cu w0.2: v1(78.961,32.355) 77.591,32.355 C17.2@77.558,32.322 77.558,34.188 C18.2@77.519,34.227 78.867,34.227 84.455,39.815 87.764,39.815 88.539,40.59 U4.108@88.943,40.59 89.791,39.742 89.791,38.02 v1(90.061,37.749) ; v1(86.614,52.007) 86.79,52.183 C22.2@86.79,53.404 87.604,52.59 U4.84@88.943,52.59 ; v1(91.948,22.035) 92.202,22.289 106.707,22.289 106.935,22.06 108.356,22.06 109.22,22.924 109.22,24.448 108.331,25.337 v1(106.426,25.337) ; v1(92.202,21.019) 102.616,21.019 103.51,21.913 104.77,21.913 105.156,21.527 108.839,21.527 v1(108.966,21.654) ; U4.62@95.818,59.965 95.818,58.932 96.461,58.289 ; 96.579,58.289 101.387,58.289 102.068,57.608 ; v1(96.804,37.599) 96.818,37.613 U4.121@96.818,38.715 ; U4.52@100.818,59.965 100.818,58.858 102.068,57.608 ; 107.318,61.305 U4.39@107.318,59.965 107.318,57.725 106.382,56.789 103.894,56.789 102.861,57.822 102.282,57.822 102.068,57.608 ; U4.144@108.318,38.715 108.318,37.542 108.634,37.226 C12.2@110.871,37.226 109.777,36.132 v1(109.728,36.132) 111.379,36.132 113.183,37.936 113.183,38.773 v1(114.3,39.89) ; U4.6@110.193,43.09 113.565,43.09 v1(114.427,42.228) ; U4.15@110.193,47.59 111.097,47.59 111.257,47.43 112.025,47.43 112.522,47.928 C13.2@112.522,49.506 112.864,49.506 v1(114.3,48.07) 114.3,48.49 C19.2@115.316,49.506 ; v1@110.236,27.877 109.855,28.258 109.855,30.29 110.617,31.052 C10.2@110.949,31.052 ; v1(110.744,32.576) 110.949,32.371 C10.2@110.949,31.052 ; v1(110.871,26.734) 110.871,28.258 110.236,28.893 110.236,30.339 C10.2@110.949,31.052 ; C16.2@110.871,62.714 112.522,64.365 112.522,65.23 113.538,66.246 113.538,70.31 117.083,73.856 129.408,73.856 129.794,73.47 134.62,78.296 v1(134.62,79.185) ; v1(116.205,24.829) 116.337,24.961 116.337,26.318 113.829,28.825 113.829,32.031 113.152,32.708 111.905,32.708 110.949,31.752 C10.2@110.949,31.052 ; v1(118.872,24.956) 118.232,25.596 118.232,26.492 120.604,28.864 v1(122.174,28.864) ; v1(138.049,40.704) 137.541,41.212 136.906,41.212 136.787,41.212 135.132,42.867 135.132,45.788 135.255,45.911 142.605,53.261 142.605,78.82 140.589,80.836 v1(139.954,80.836)
  F.Cu w0.25: v1(86.106,54.42) 86.106,54.088 C22.2@86.79,53.404 ; v1(88.011,59.373) 89.203,60.565 C15.2@89.203,61.151 89.203,60.34 89.578,59.965 U4.72@90.818,59.965 ; U4.39@107.318,59.965 107.318,61.447 C14.2@108.712,62.841 ; D5.2@108.77,67.934 107.947,67.111 107.947,63.606 C14.2@108.712,62.841 ; U4.17@110.193,48.59 111.34,48.59 112.256,49.506 C13.2@112.522,49.506 ; C16.2@110.871,62.714 108.839,62.714 C14.2@108.712,62.841
  F.Cu w0.7: C10.2@110.949,31.052 111.052,30.949 FB5.1@111.052,29.274
  B.Cu w0.2: v1(78.961,32.355) 84.055,32.355 89.161,27.249 89.161,24.582 89.154,24.575 91.694,22.035 v1(91.948,22.035) ; v1(86.614,52.007) 85.977,52.007 83.184,49.214 76.931,42.961 76.931,38.576 79.756,35.751 82.296,33.211 82.296,33.084 82.042,32.83 81.915,32.83 79.502,32.83 79.248,33.084 78.613,33.084 78.232,32.703 78.232,31.814 78.486,31.56 79.629,31.56 79.756,31.687 80.523,30.92 84.46,30.92 85.979,29.401 88.646,26.734 88.646,23.432 91.059,21.019 v1(92.202,21.019) ; v1(90.061,37.749) 96.655,37.749 v1(96.804,37.599) ; v1(106.426,25.337) 106.426,25.479 108.57,27.623 v1(110.236,27.623) ; v1(108.966,21.654) 108.966,21.838 107.58,23.224 107.58,24.713 109.601,26.734 v1(110.871,26.734) ; v1(109.728,36.132) 109.728,33.592 v1(110.744,32.576) ; v1(114.3,39.89) 115.889,41.479 115.889,42.166 ; v1(114.3,48.07) 114.3,46.23 114.01,46.23 113.6,45.82 113.6,45.24 114.01,44.83 114.399,44.83 115.889,43.341 115.889,42.166 ; v1(114.427,42.228) 114.489,42.166 115.889,42.166 ; v1(116.205,24.829) 118.745,24.829 v1(118.872,24.956) ; v1(122.174,28.864) 122.174,24.059 126.357,19.876 127.891,19.876 129.195,21.18 129.195,22.182 127.691,23.686 127.691,29.322 137.037,38.668 138.049,39.68 v1(138.049,40.704) ; v1(134.62,79.185) 138.303,79.185 v1(139.954,80.836)
  B.Cu w0.25: v1(86.106,54.42) 86.106,57.468 v1(88.011,59.373)
VDDUSB: C7.2 C9.2 C11.2 FB7.2 U4.106 | length 28.1
  F.Cu w0.2: v1(83.312,39.942) 83.493,39.942 85.141,41.59 U4.106@88.943,41.59 ; v1(89.276,34.266) 92.04,31.502 C7.2@92.04,29.42 94.46,29.42 C9.2@94.48,29.4 96.82,29.4 C11.2@96.87,29.35 99.085,29.35 FB7.2@99.31,29.125
  B.Cu w0.2: v1(83.312,39.942) 83.312,39.829 88.876,34.266 v1(89.276,34.266)
pads on no net: D3.2

## Polygon pours and split planes (outlines as drawn)
+3V3 on F.Cu "F.Cu-+3V3" (solid, remove dead copper, pour order 0): 119.507,16.193 110.363,16.193 110.363,20.892 119.507,20.892
GND on B.Cu "B.Cu-GND" (solid, remove dead copper, pour order 1): 144.78,2.35 50.8,2.35 50.8,96.33 144.78,96.33

## Keep-outs
Edge.Cuts:
  lines w0.01: 50,2.13 145,2.13 ; 50,2.13 50,97.13 ; 50,2.13 145,2.13 ; 50,2.13 50,97.13 ; 50,97.13 145,97.13 ; 50,97.13 145,97.13 ; 145,2.13 145,97.13 ; 145,2.13 145,97.13

## Silkscreen, mask and mechanical layers (free items; w line width, h text height)
F.SilkS:
  text "I/O Connector" at 77.337,93.502 h0.8
  text "CubeSAT OBC V1" at 118.658,70.247 h1.5
  text "ADCS 2" at 56.707,68.789 h0.8 r90
  text "ADCS 1" at 131.707,67.798 h0.8 r90
  text "DNP" at 75.265,37.682 h0.5
  text "DNP" at 71.335,31.642 h0.5
  text "DNP" at 78.148,27.615 h0.5 r90
  text "JLCJLCJLCJLC" at 60.072,24.828 h0.5 r90
  text "DNP" at 78.378,23.294 h0.5
  text "DNP" at 131.21,18.849 h0.5
  text "DNP" at 73.218,18.165 h0.5 r90
  text "3.3V" at 123.426,7.328 h0.5
  text "GND" at 125.986,7.328 h0.5
  text "5V" at 72.142,6.465 h0.8
  text "GND" at 69.41,6.433 h0.8
B.SilkS:
  text "2021-2022 OBC Team: / Jake Milley / Shenghao Jin / Jeremy Dube / Cassidy Samoyloff / Jacob Sagalovitch / Kishori Kuganeswaran / Harrison Gordon / Armando Casanova / Tomas Harmer / Ivan Lipski / Jillian Malherbe" at 143.764,32.113 h1

## Text inside footprints (layer, text, board x,y; h text height)
J4: F.Fab "PCB-EDGE" at 87.53,20.284 h0.47
J8: F.Fab "PCB-EDGE" at 134.466,57.86 h0.47 r90
U2: F.SilkS "*" at 71.164,74.242 h0.5
U4: F.Fab "*" at 99.446,49.223 h1; F.SilkS "*" at 99.446,49.223 h1; Dwgs.User "0.837in/21.25mm" at 97.463,65.94 h1; Dwgs.User "0.053in/1.346mm" at 86.838,35.381 h1; Dwgs.User "0.837in/21.25mm" at 79.383,49.054 h1; Dwgs.User "0.014in/0.356mm" at 114.349,40.304 h1; Dwgs.User "0.02in/0.5mm" at 112.264,49.054 h1; Cmts.User "Copyright 2021 Accelerated Designs. All rights reserved." at 98.707,49.291 h0.13
U5: F.Fab "*" at 127.411,36.618 h1; F.SilkS "*" at 127.259,37.666 h1; Cmts.User "Copyright 2021 Accelerated Designs. All rights reserved." at 126.672,36.687 h0.13